# EAGLE board stm board v3 (EAGLE 7.4.0)
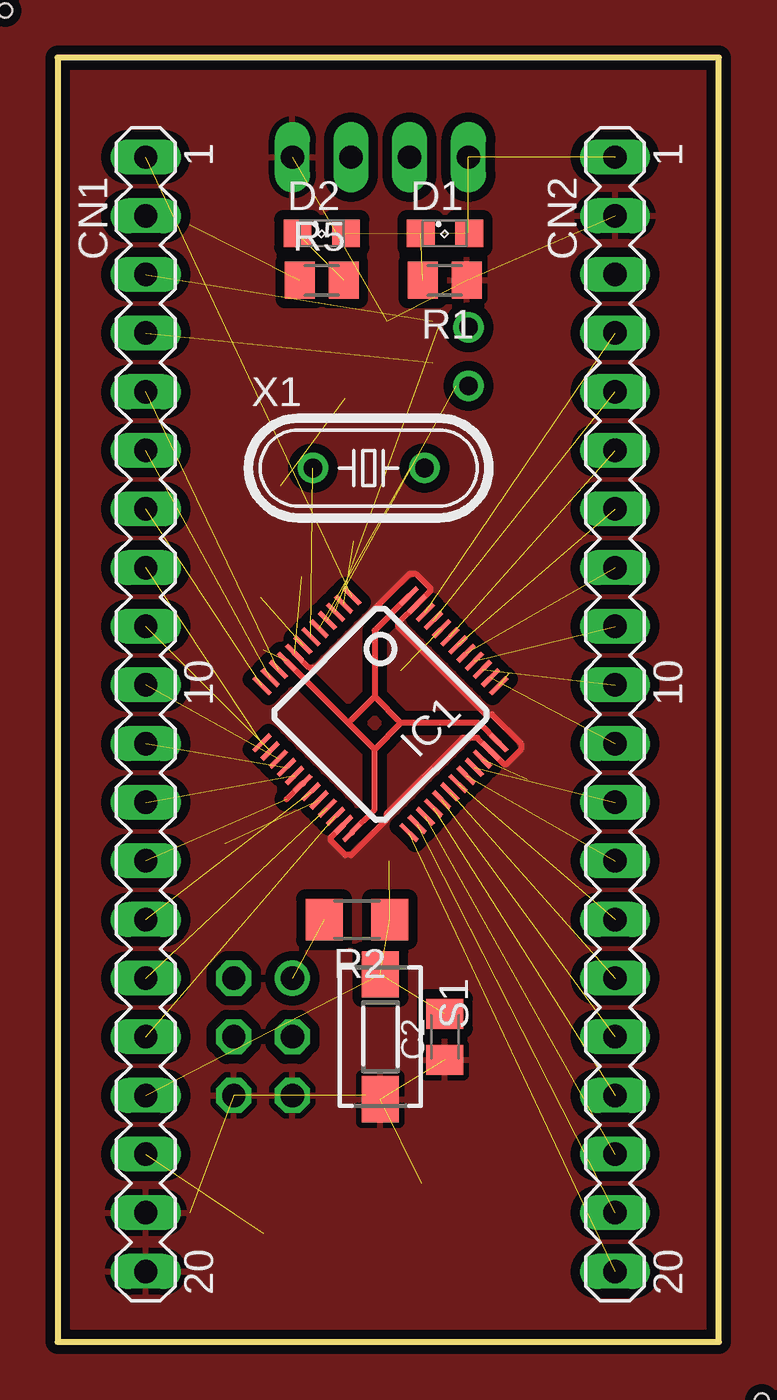
[diagram p0: board, top side]
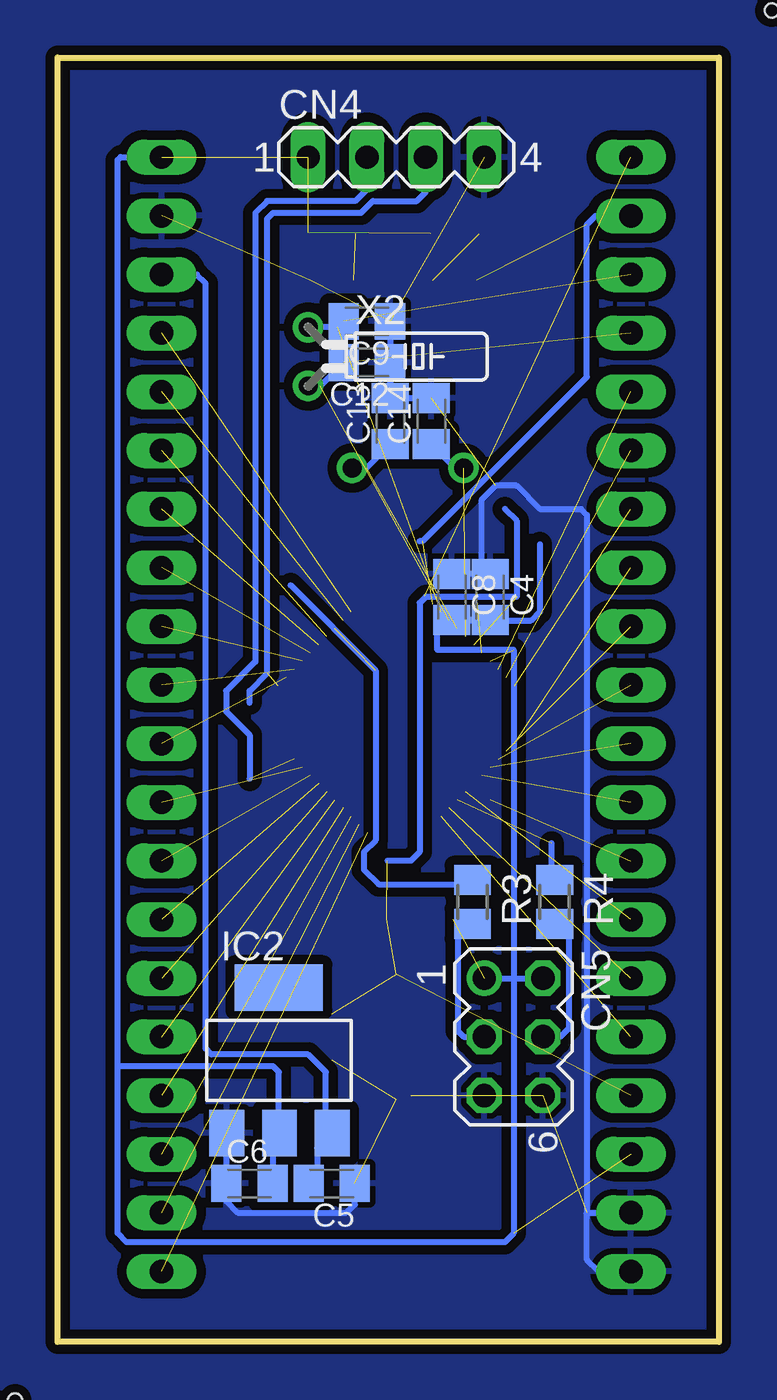
[diagram p1: board, bottom side, seen from below]

Size 28.63 x 55.62 mm. Coordinates in mm from the lower left corner, seen from the top.
Outline: 0,0 28.63,0 28.63,55.62 0,55.62 0,0
Copper layers (1*16): Top 0.035mm / dielectric 1.5mm / Bottom 0.035mm
Design rules "default *": minimum track width 10mil, minimum drill 24mil, track to track 16mil, track to pad 16mil, pad to pad 16mil, via to via 16mil, smd to smd 16mil, copper to edge 10mil, drill to drill 8mil, minimum pad ring 10mil, minimum via ring 8mil, stop-mask expansion 4mil, vias tented up to drill 0mil, thermal gap 10mil
Holes 0.6 mm at 30.48,-2.54 -2.29,57.66

## Footprints (pad centres in the part's own frame; a part is rotated, then mirrored left to right if it is on the bottom)
C0805K = smd 1.3 x 1.6: 1 -1,0; 2 1,0
MA20-1L = drill 1.016 long: 1 24.13,0; 2 21.59,0; 3 19.05,0; 4 16.51,0; 5 13.97,0; 6 11.43,0; 7 8.89,0; 8 6.35,0; 9 3.81,0; 10 1.27,0; 11 -1.27,0; 12 -3.81,0; 13 -6.35,0; 14 -8.89,0; 15 -11.43,0; 16 -13.97,0; 17 -16.51,0; 18 -19.05,0; 19 -21.59,0; 20 -24.13,0
MA04-1 = drill 1.016 long: 1 -3.81,0; 2 -1.27,0; 3 1.27,0; 4 3.81,0
MA03-2 = drill 1.016: 1 -2.54,-1.27 | drill 1.016 octagon: 2 -2.54,1.27; 3 0,-1.27; 4 0,1.27; 5 2.54,-1.27; 6 2.54,1.27
SML0805 = smd 1.2 x 1.2: A 1.05,0; C -1.05,0
TQFP48 = smd 0.2 x 1: 1 -2.75,-4.5; 2 -2.25,-4.5; 3 -1.75,-4.5; 4 -1.25,-4.5; 5 -0.75,-4.5; 6 -0.25,-4.5; 7 0.25,-4.5; 8 0.75,-4.5; 9 1.25,-4.5; 10 1.75,-4.5; 11 2.25,-4.5; 12 2.75,-4.5; 25 2.75,4.5; 26 2.25,4.5; 27 1.75,4.5; 28 1.25,4.5; 29 0.75,4.5; 30 0.25,4.5; 31 -0.25,4.5; 32 -0.75,4.5; 33 -1.25,4.5; 34 -1.75,4.5; 35 -2.25,4.5; 36 -2.75,4.5 | smd 1 x 0.2: 13 4.5,-2.75; 14 4.5,-2.25; 15 4.5,-1.75; 16 4.5,-1.25; 17 4.5,-0.75; 18 4.5,-0.25; 19 4.5,0.25; 20 4.5,0.75; 21 4.5,1.25; 22 4.5,1.75; 23 4.5,2.25; 24 4.5,2.75; 37 -4.5,2.75; 38 -4.5,2.25; 39 -4.5,1.75; 40 -4.5,1.25; 41 -4.5,0.75; 42 -4.5,0.25; 43 -4.5,-0.25; 44 -4.5,-0.75; 45 -4.5,-1.25; 46 -4.5,-1.75; 47 -4.5,-2.25; 48 -4.5,-2.75
SOT223 = smd 1.499 x 2.007: 1 -2.261,-3.15; 2 0.025,-3.15; 3 2.311,-3.15 | smd 3.81 x 2.007: 4 0,3.15
M0805 = smd 1.3 x 1.6: 1 -0.95,0; 2 0.95,0
R1206 = smd 1.6 x 1.803: 1 -1.422,0; 2 1.422,0
DTSM-3 = smd 2 x 1.6: 1 -2.7,0; 2 2.7,0
HC49/S = drill 0.813: 1 -2.413,0; 2 2.413,0
TC26H = drill 0.813: 1 -1.27,0; 2 1.27,0

## Placement (x,y rotation side)
C2  100n  [C0805K]  16.76,13.21 90 top
C4  100n  [C0805K]  9.91,32.26 270 bottom
C5  10u  [C0805K]  16.76,6.86 180 bottom
C6  10u  [C0805K]  20.32,6.86 0 bottom
C8  100n  [C0805K]  11.56,32.26 270 bottom
C9  100p  [C0805K]  15.24,44.2 180 bottom
C12  100p  [C0805K]  15.24,42.42 180 bottom
C13  12p  [C0805K]  14.22,39.88 90 bottom
C14  12p  [C0805K]  12.45,39.88 90 bottom
CN1  [MA20-1L]  3.81,27.18 90 top
CN2  [MA20-1L]  24.13,27.18 90 top
CN4  [MA04-1]  13.97,51.31 0 bottom
CN5  [MA03-2]  8.89,13.21 270 bottom
D1  red  [SML0805]  16.76,48.01 0 top
D2  blue  [SML0805]  11.43,48.01 0 top
IC1  STM32F10XCXT6  [TQFP48]  13.97,27.18 225 top
IC2  REG1117  [SOT223]  19.05,12.19 0 bottom
R1  510  [M0805]  16.76,45.97 180 top
R2  10k  [R1206]  12.95,18.29 180 top
R3  100k  [M0805]  10.67,19.05 270 bottom
R4  100k  [M0805]  7.11,19.05 270 bottom
R5  510  [M0805]  11.43,45.97 0 top
S1  DTSM-3  [DTSM-3]  13.97,13.21 270 top
X1  8M  [HC49/S]  13.46,37.85 0 top
X2  32k768  [TC26H]  17.78,42.67 270 bottom

## Library data of the parts
C2 C4-C6 C8 C9 C12-C14 R1-R5 = resistor
CN1 CN2 CN4 CN5 = con-lstb; OC_FARNELL: unknown; OC_NEWARK: unknown
D1 D2 = led
IC1 = stm32
IC2 = burr-brown; MPN: REG1117; OC_FARNELL: 1097566; OC_NEWARK: 14P6981
S1 = switch-tact
X1 = crystal; OC_FARNELL: 1667008; OC_NEWARK: unknown
X2 = crystal; OC_FARNELL: unknown; OC_NEWARK: unknown

## Nets
3VB: CN1.1 IC1.1
+3V3: C4.2 C6.2 C8.2 CN1.18 CN2.1 CN4.1 CN5.1 CN5.2 D1.A D2.A IC1.9 IC1.24 IC1.36 IC1.48 IC2.2 R2.2
+5V: C5.2 CN2.3 IC2.3
_BOOT0: IC1.44 R3.1
_BOOT1: IC1.20 R4.1
A0: CN1.5 IC1.10
A1: CN1.6 IC1.11
A2: CN1.7 IC1.12
A3: CN1.8 IC1.13
A4: CN1.9 IC1.14
A5: CN1.10 IC1.15
A6: CN1.11 IC1.16
A7: CN1.12 IC1.17
A8: CN2.16 IC1.29
A9: CN2.15 IC1.30
A10: CN2.14 IC1.31
A11: CN2.13 IC1.32
A12: CN2.12 IC1.33
A15: CN2.11 IC1.38
B0: CN1.13 IC1.18
B1: CN1.14 IC1.19
B3: CN2.10 IC1.39
B4: CN2.9 IC1.40
B5: CN2.8 IC1.41
B6: CN2.7 IC1.42
B7: CN2.6 IC1.43
B8: CN2.5 IC1.45
B9: CN2.4 IC1.46
B10: CN1.15 IC1.21
B11: CN1.16 IC1.22
B12: CN2.20 IC1.25
B13: CN2.19 IC1.26
B14: CN2.18 IC1.27
B15: CN2.17 IC1.28
BOOT0: CN5.3 R3.2
BOOT1: CN5.4 R4.2
C13: CN1.2 IC1.2 R5.1
C14: C9.2 CN1.3 IC1.3 X2.1
C15: C12.2 CN1.4 IC1.4 X2.2
DCLK: CN4.3 IC1.37
DIO: CN4.2 IC1.34
GND: C2.1 C4.1 C5.1 C6.1 C8.1 C9.1 C12.1 C13.2 C14.2 CN1.19 CN1.20 CN2.2 CN4.4 CN5.5 CN5.6 IC1.8 IC1.23 IC1.35 IC1.47 IC2.1 R1.1 S1.2
N$1: C13.1 IC1.5 X1.2
N$2: C14.1 IC1.6 X1.1
N$5: D1.C R1.2
N$6: D2.C R5.2
R: C2.2 CN1.17 IC1.7 R2.1 S1.1

## Tracks (layer width: path | path; a pad name or v marks a point on that pad's centre or on a via)
3VB  (1 unrouted)
+3V3  (6 unrouted)
  Top 0.254: IC1.9 12.58,26.8 | 12.58,26.8 13.72,25.66 13.72,25.65 | IC1.48 13.72,30.81 13.72,27.94 | IC1.36 18.24,26.8 14.86,26.8 | IC1.24 13.72,23.03 13.72,25.65 | 13.72,27.94 12.58,26.8 | 13.72,27.94 14.86,26.8 | 14.86,26.8 13.72,25.65 | D1.A 17.78,48.04
  Bottom 0.254: 8.89,15.75 8.89,29.97 12.19,29.97 12.19,31.24 11.56,31.24 | 8.89,15.75 CN5.2 | 9.4,31.75 9.89,31.26 C4.2 10.53,31.12 10.67,31.26 C8.2 11.56,31.24 | 7.75,34.54 7.75,31.62 8.13,31.24 11.56,31.24 | C6.2 19.32,8.75 IC2.2 19.05,9.07 19.05,11.68 19.3,11.94 26.03,11.94 | 26.03,11.94 26.03,51.18 25.91,51.31 CN2.1 | CN5.1 8.89,15.75 | 8.89,15.75 8.89,4.7 9.27,4.32 25.65,4.32 26.03,4.7 26.03,11.94
+5V
  Bottom 0.254: C5.2 17.76,6.87 17.4,7.24 17.4,8.38 IC2.3 17.02,9.32 17.02,11.68 17.78,12.45 21.97,12.45 22.23,12.7 22.23,45.85 22.61,46.23 CN2.3
_BOOT0  (1 unrouted)
  Bottom 0.254: 18.54,32.77 14.86,29.08 14.86,21.72 15.37,21.21 15.37,20.45 14.73,19.81 11.3,19.81 11.12,20 R3.1
_BOOT1  (1 unrouted)
  Bottom 0.254: R4.1 7.24,20.13 7.24,21.59
A0  (1 unrouted)
A1  (1 unrouted)
A2  (1 unrouted)
A3  (1 unrouted)
A4  (1 unrouted)
A5  (1 unrouted)
A6  (1 unrouted)
A7  (1 unrouted)
A8  (1 unrouted)
A9  (1 unrouted)
A10  (1 unrouted)
A11  (1 unrouted)
A12  (1 unrouted)
A15  (1 unrouted)
B0  (1 unrouted)
  Top 0.254: IC1.18 10.58,24.17 9.91,23.49
B1  (1 unrouted)
B3  (1 unrouted)
B4  (1 unrouted)
B5  (1 unrouted)
B6  (1 unrouted)
B7  (1 unrouted)
B8  (1 unrouted)
B9  (1 unrouted)
B10  (1 unrouted)
B11  (1 unrouted)
B12  (1 unrouted)
B13  (1 unrouted)
B14  (1 unrouted)
B15  (1 unrouted)
BOOT0
  Bottom 0.254: R3.2 11.3,17.47 11.3,13.46 11.05,13.21 CN5.3
BOOT1
  Bottom 0.254: CN5.4 6.86,13.21 6.48,13.59 6.48,17.65 6.92,18.1 R4.2
C13  (2 unrouted)
  Bottom 0.254: 12.95,34.67 12.83,34.67 5.72,41.78 5.72,48.39 5.33,48.77 CN1.2
C14  (2 unrouted)
  Bottom 0.254: C9.2 16.49,43.94 X2.1
C15  (2 unrouted)
  Bottom 0.254: C12.2 17.26,41.4 X2.2
DCLK  (1 unrouted)
  Bottom 0.254: 20.32,27.69 20.32,28.19 19.56,28.96 19.56,48.64 19.3,48.89 15.49,48.89 14.99,49.4 13.08,49.4 12.7,49.78 CN4.3
DIO  (1 unrouted)
  Bottom 0.254: CN4.2 15.24,49.91 15.75,49.4 19.56,49.4 20.07,48.89 20.07,29.46 21.34,28.19 21.34,27.3 20.32,26.29 20.32,24.38
GND  (10 unrouted)
  Top 0.254: IC1.8 10.88,29.21 11.18,29.21 15.24,33.27 15.49,33.27 16.13,32.64 16.13,32.52 IC1.47 14.73,31.12 14.73,30.99 18.54,27.18 18.8,27.18 20.07,25.91 20.07,25.65 19.43,25.02 19.31,25.02 IC1.35 18.17,26.16 17.53,26.16 14.22,22.86 14.22,22.61 12.7,21.08 12.45,21.08 11.81,21.72 11.81,21.84 IC1.23 | 13.34,10.67 13.5,10.51 S1.2
  Bottom 0.254: 5.72,5.59 5.72,35.81 5.97,36.07 7.75,36.07 8.76,37.08 9.65,37.08 10.29,36.45 10.29,33.78 9.91,33.4 C4.1 | C4.1 10.56,33.15 10.67,33.26 C8.1 | 9.41,33.26 C4.1 | 5.72,5.59 CN1.19 | CN1.20 5.21,3.05 5.72,3.56 5.72,5.59 | C9.1 C12.1 14.22,42.4 C13.2 C14.2 | C6.1 IC2.1 21.34,9.02 21.34,6.1 20.83,5.59 16.13,5.59 15.76,5.95 C5.1
  pour Top (isolate 0.406): 28.19,0.51 0.25,0.51 0.25,55.37 28.19,55.37
  pour Bottom (isolate 0.406): 28.19,0.51 0.51,0.51 0.51,55.12 28.19,55.12
N$1  (1 unrouted)
  Bottom 0.254: C13.1 15.26,37.85 X1.2
N$2  (1 unrouted)
  Bottom 0.254: C14.1 11.41,37.85 X1.1
N$3
  pour Bottom (isolate 0.406): 31.5,-3.56 -3.3,-3.56 -3.3,58.67 31.5,58.67
N$5  (1 unrouted)
N$6  (1 unrouted)
OUT
  pour Top (isolate 0.406): 31.5,-3.56 -3.3,-3.56 -3.3,58.67 31.5,58.67
R  (5 unrouted)
  Bottom 0.254: 14.35,20.83 13.34,20.83 12.95,21.21 12.95,32 12.7,32.26 8.76,32.26 8.76,35.56 9.27,36.07